# Altium PCB PCB1.PcbDoc
Units mil, origin at the board's own origin, x right, y up, seen from the top; angles counter-clockwise.
Board outline 6000 x 4000 mil, 2 copper layers (Top Layer, Bottom Layer); 7 components, 4 nets, 18 pads, 10 vias.
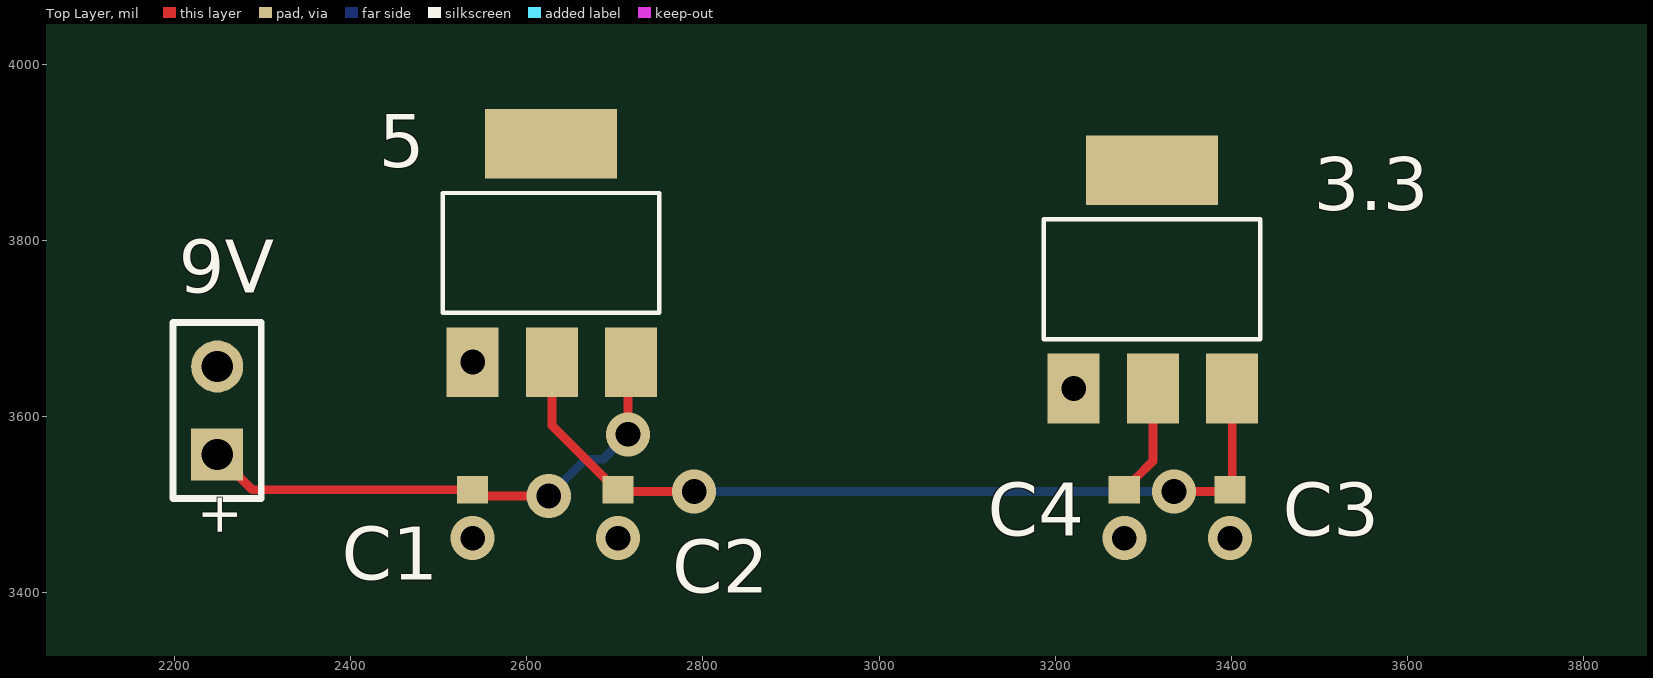
[diagram p0: Top Layer view]
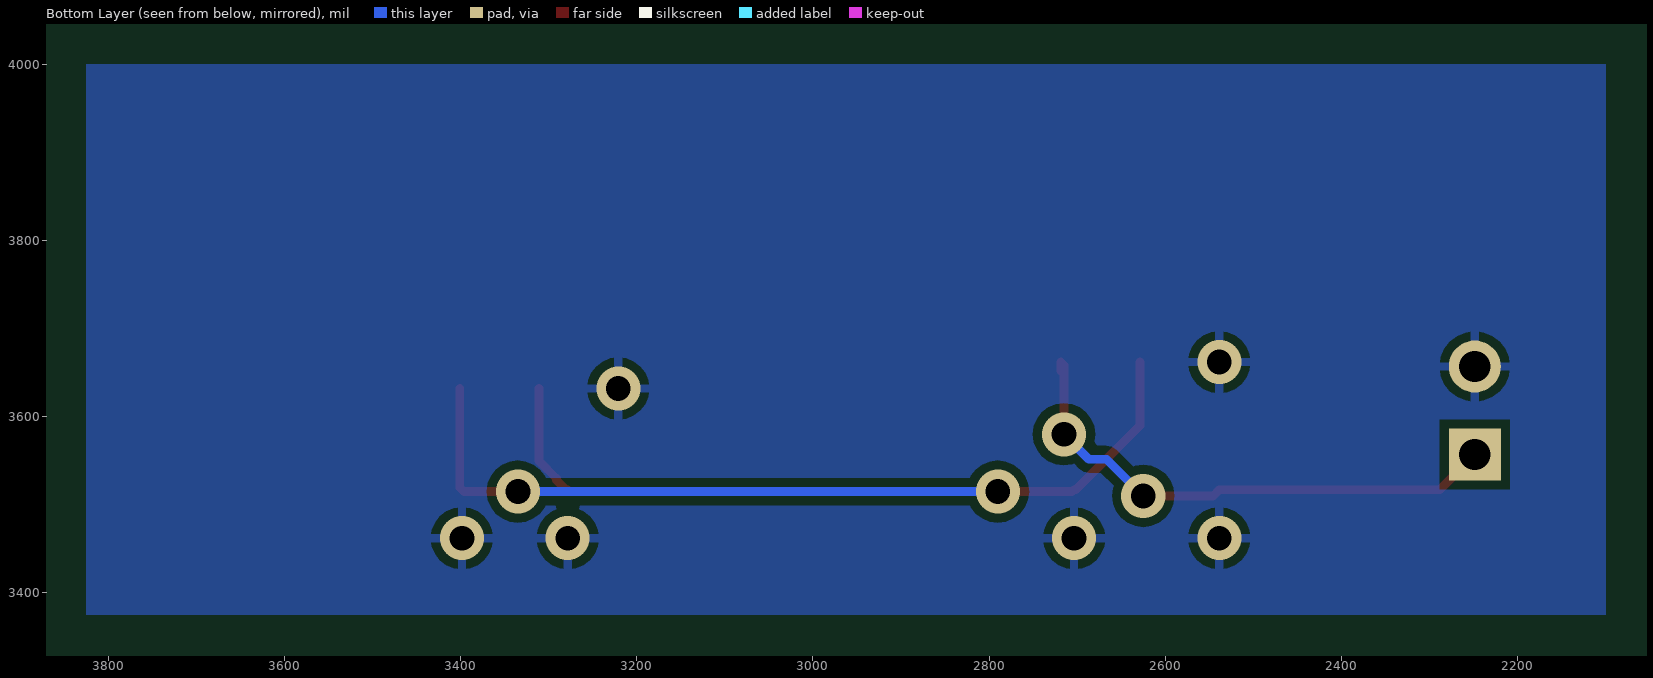
[diagram p1: Bottom Layer view, seen from below]

## Layer stack, top to bottom
Top Solder: solder mask 0.4, Solder Resist, Dk 3.5
Top Layer: signal copper 1.4
Dielectric 1: dielectric 12.6, FR-4, Dk 4.8
Bottom Layer: signal copper 1.4
Bottom Solder: solder mask 0.4, Solder Resist, Dk 3.5

## Board outline
1000,1000 7000,1000 7000,5000 1000,5000

## Design rules (kind name [scope] priority, off if disabled: settings)
Clearance [All] p1: gap=10 ignorepadtopadclearanceinfootprint=FALSE except(0: Arc-Hole Track-Hole SMDPad-Hole THPad-Hole Via-Hole Fill-Hole Poly-Hole Region-Hole Text-Hole)
PolygonConnect [All] p1: connectstyle=Relief reliefconductorwidth=10 reliefentries=4 polygonreliefangle="90 Angle" airgapwidth=10
RoutingVias [All] p1: holewidth=28 width=50 viastyle="Through Hole" minholewidth=28 minwidth=50 maxholewidth=28 maxwidth=50
SolderMaskExpansion [All] p1: expansion=4
Width [All] p1: maxlimit=10 minlimit=10 preferedwidth=10
30 further rules are at their usual default settings.

## Components (designator, comment, footprint, x,y, rotation, side; value= is the part's Value field where it differs from the comment)
3.3 "LM1117-3.3" *SOT-223 3310,3756 r0 top
5 "LM1117-5" *SOT-223 2627.56,3786 r0 top
9V "Battery" BAT-2 2248.56,3607 r90 top
C1 "Cap Tan" 1608[0603] 2538.56,3489.56 r90 top value=10uF
C2 "Cap Tan" 1608[0603] 2703.56,3489.56 r270 top value=10uF
C3 "Cap Tan" 1608[0603] 3398.56,3489.56 r90 top value=10uF
C4 "Cap Tan" 1608[0603] 3278.56,3489.56 r270 top value=10uF

## Footprints (in the part's own frame and the unit in brackets; to place one, negate y for a bottom-side part, rotate by r counter-clockwise, add the part's x,y. Pads: shape width x height; smd on the part's side, far side on the other; paste and mask are expansions set on the pad)
1608[0603] [mm] "Chip Capacitor, Body 1.6x0.8mm, IPC High Density"
  rect 0.8x0.9 smd: 1(-0.7,0) 2(0.7,0)
  body extent -0.87,-0.48 0.87,0.48, height 1.3
*SOT-223 [mil]
  rect 59x79 smd: 1(-89,-124) 2(1,-124) 3(91,-124)
  rect 150x79 smd: 4(0,124)
  silkscreen extent -123,-68 123,68
BAT-2 [mm] "Battery; 2 Leads"
  rect 1.5x1.5 hole 0.9: 1(-1.27,0)
  round 1.5 hole 0.9: 2(1.27,0)
  silkscreen extent -2.54,-1.27 2.54,1.27

## Part data
3.3: "Linear Voltage Regulator IC 1 Output 800mA SOT-223-4", Package="SOT-223-4 Texas Instruments", Availability=Unavailable, MF="Texas Instruments", MP=LM1117-3.3, Price=None, SnapEDA_Link=https://www.snapeda.com/parts/LM1117-3.3/Texas%20Instruments/view-part/549181/?ref=snap
5: library part LM1117-3.3, "Linear Voltage Regulator IC 1 Output 800mA SOT-223-4", Package="SOT-223-4 Texas Instruments", Availability=Unavailable, MF="Texas Instruments", MP=LM1117-3.3, Price=None, SnapEDA_Link=https://www.snapeda.com/parts/LM1117-3.3/Texas%20Instruments/view-part/549181/?ref=snap
9V: "Multicell Battery", LatestRevisionDate=17-Jul-2002, LatestRevisionNote="Re-released for DXP Platform.", PackageDescription="Battery; 2 Leads", PackageReference=BAT-2, Published=24-Mar-1999, Publisher="Altium Limited"
C1 C2 C3 C4: library part "Cap Semi", "Capacitor (Semiconductor SIM Model)", LatestRevisionDate=29-May-2009, LatestRevisionNote="IPC-7351 Footprint Added.", PackageDescription="Chip Capacitor", PackageReference=C1206, Published=8-Jun-2000, Publisher="Altium Limited"

## Via types
v1: diameter 50, hole 28, Top Layer to Bottom Layer, 10 vias

## Nets (pads, with @x,y where several pads share a name; then routed paths per layer and width w, separated by ;. In a path a pad name is that pad's centre, name@x,y a point inside that pad or via, vN(x,y) a via of type N, cw(c..) or ccw(c..) an arc to the next point about the centre after c; other vN are vias at no path point)
+3.3: 3.3.2 C4.1 | length 129.5
  Top Layer w10: C4.1 3280.53,3517.12 3291.28,3527.87 3291.28,3529.83 3311,3549.56 3.3.2
+5: 3.3.3 5.2 C2.1 C3.2 | length 989.7
  Top Layer w10: 5.2 2628.56,3590.15 2701.59,3517.12 C2.1 2705.68,3515 v1(2790,3515) ; v1(3335,3515) 3396.44,3515 C3.2 3401,3519.56 3.3.3
  Bottom Layer w10: v1(2790,3515) v1(3335,3515)
GND: 3.3.1 5.1 9V.2 C1.1 C2.2 C3.1 C4.2
  other v1: 2538.56,3462 2703.56,3462 3278.56,3462 3398.56,3462 3221,3632 2538.56,3662
Net5_3: 5.3 9V.1 C1.2 | length 608.4
  Top Layer w10: 9V.1 2288.44,3517.12 C1.2 2545.68,3510 v1(2625,3510) ; v1(2715,3580) 2715,3658.44 5.3 5.3@2718.56,3652
  Bottom Layer w10: v1(2625,3510) 2666.72,3551.72 2686.72,3551.72 v1(2715,3580)
pads on no net: 3.3.4 5.4

## Polygon pours and split planes (outlines as drawn)
GND on Bottom Layer (solid, pour order 14): 2100,4000 2100,3375 3825,3375 3825,4000

## Text inside footprints (layer, text, board x,y; h text height)
9V: Top Overlay "+" at 2271.28,3462.51 h45.28 r90